# Allegro board io_4di_4do.brd
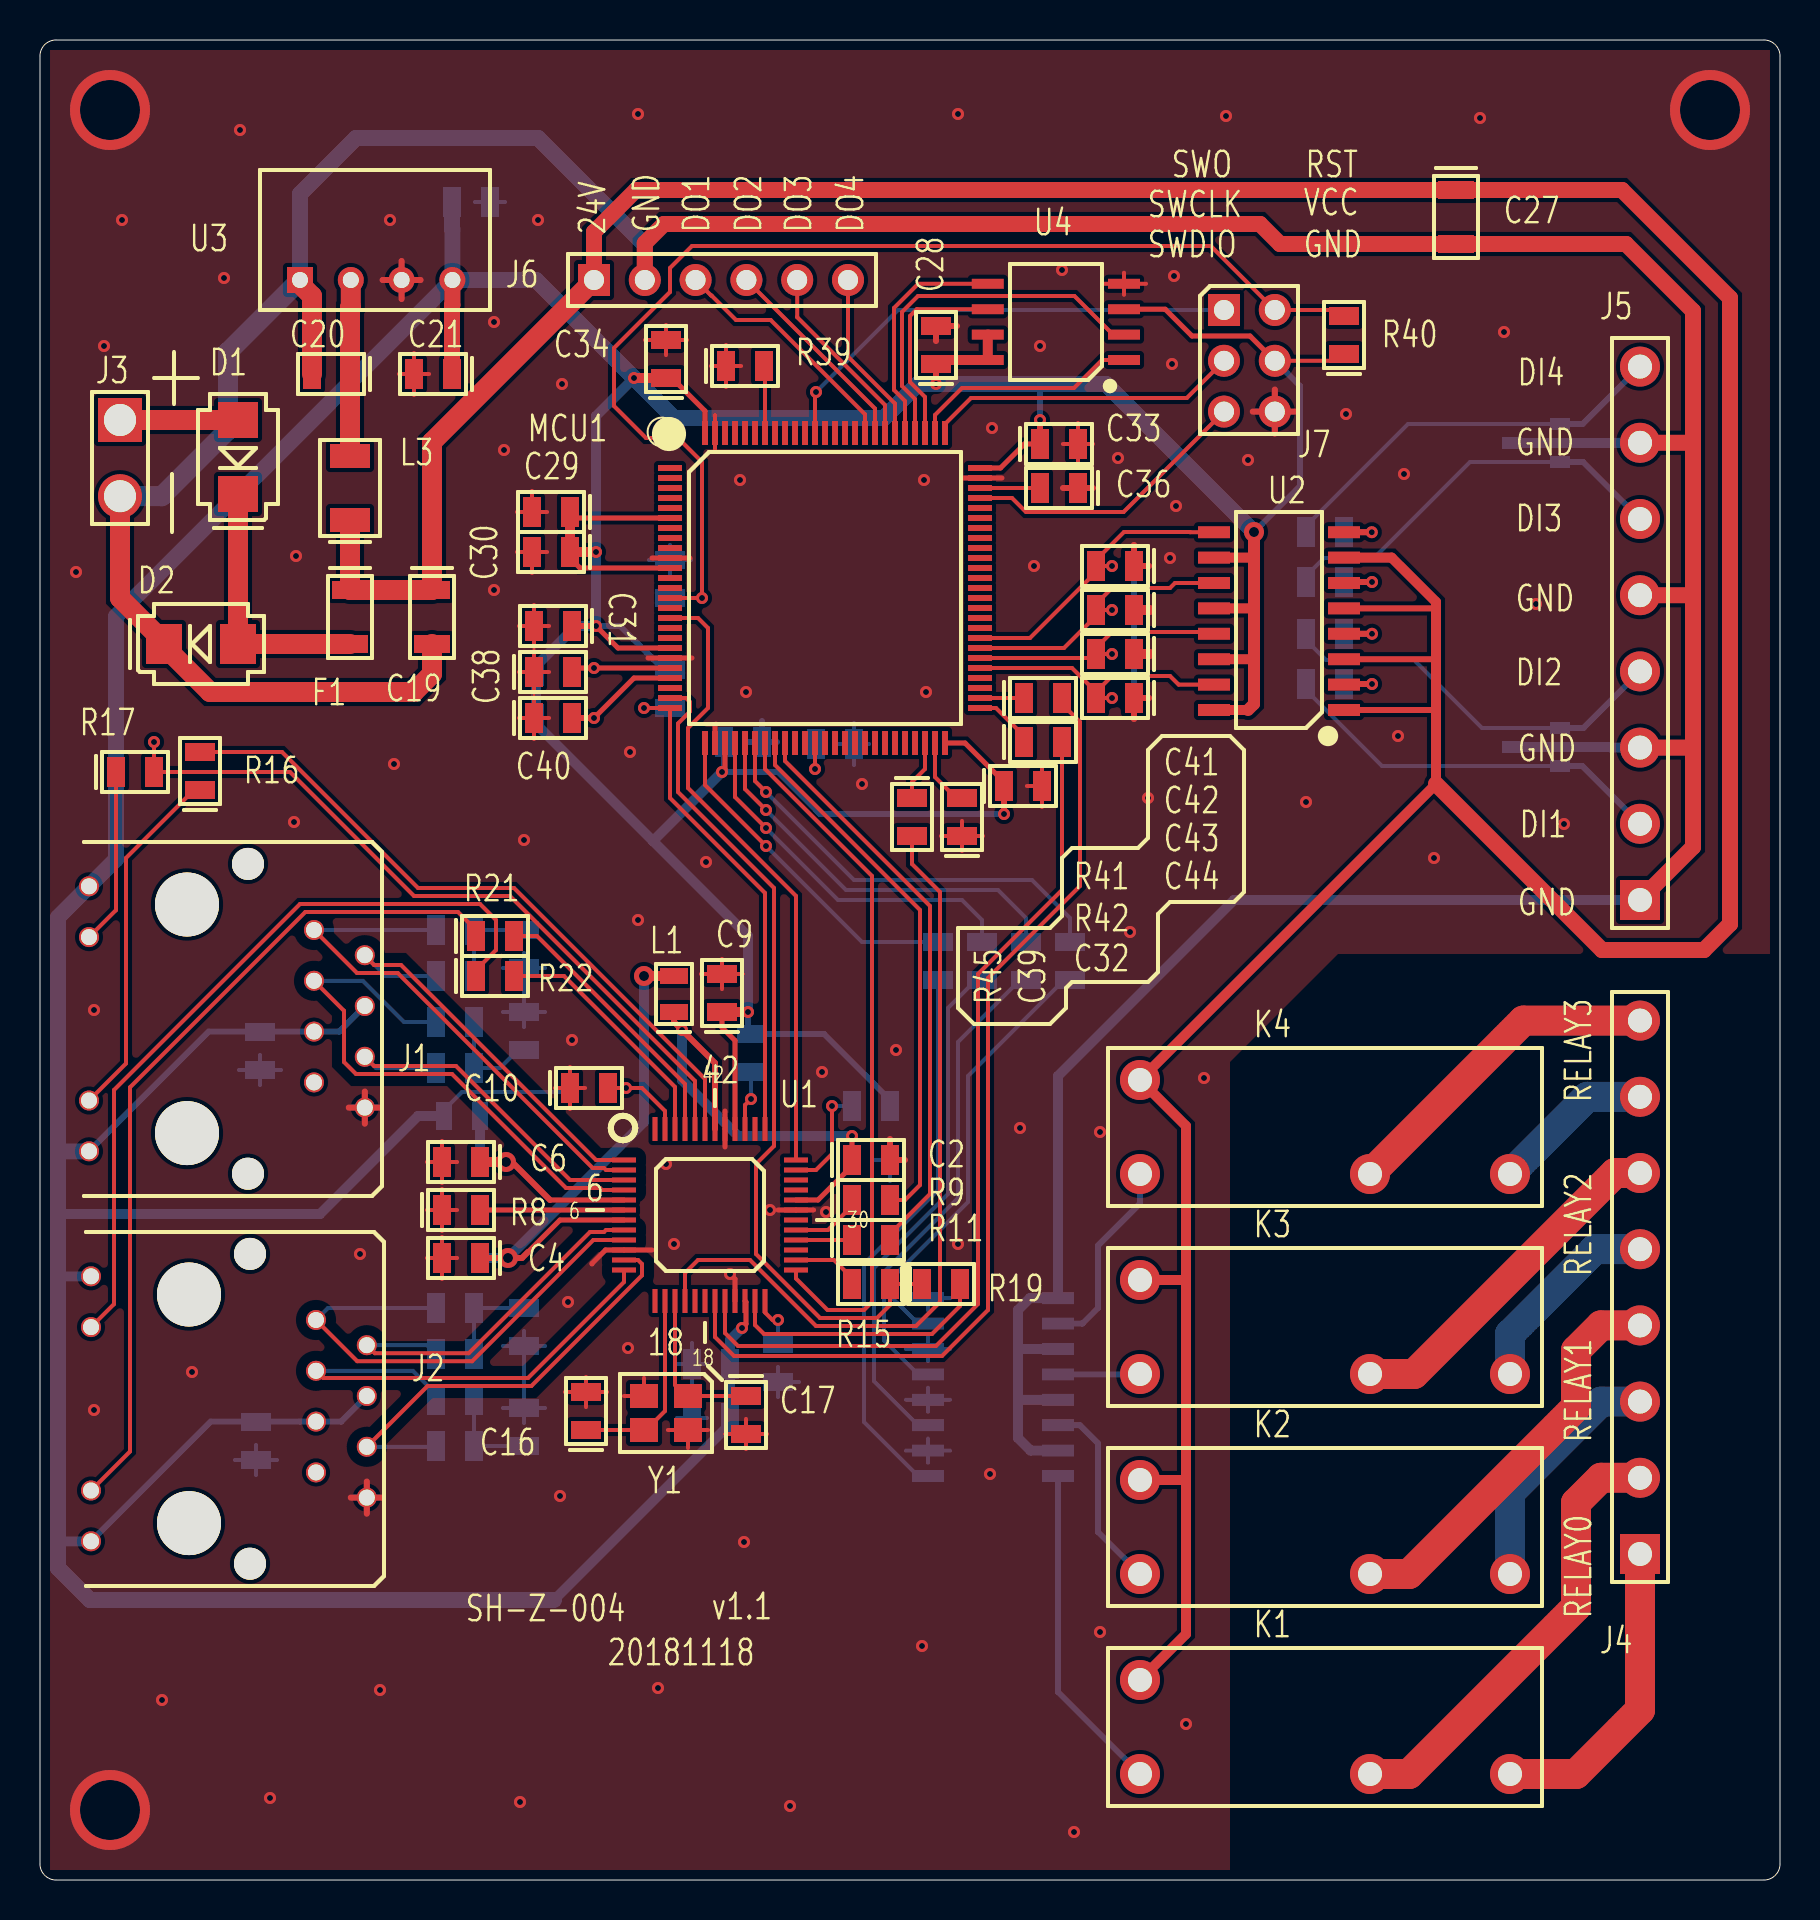
[diagram p0: board, top side]
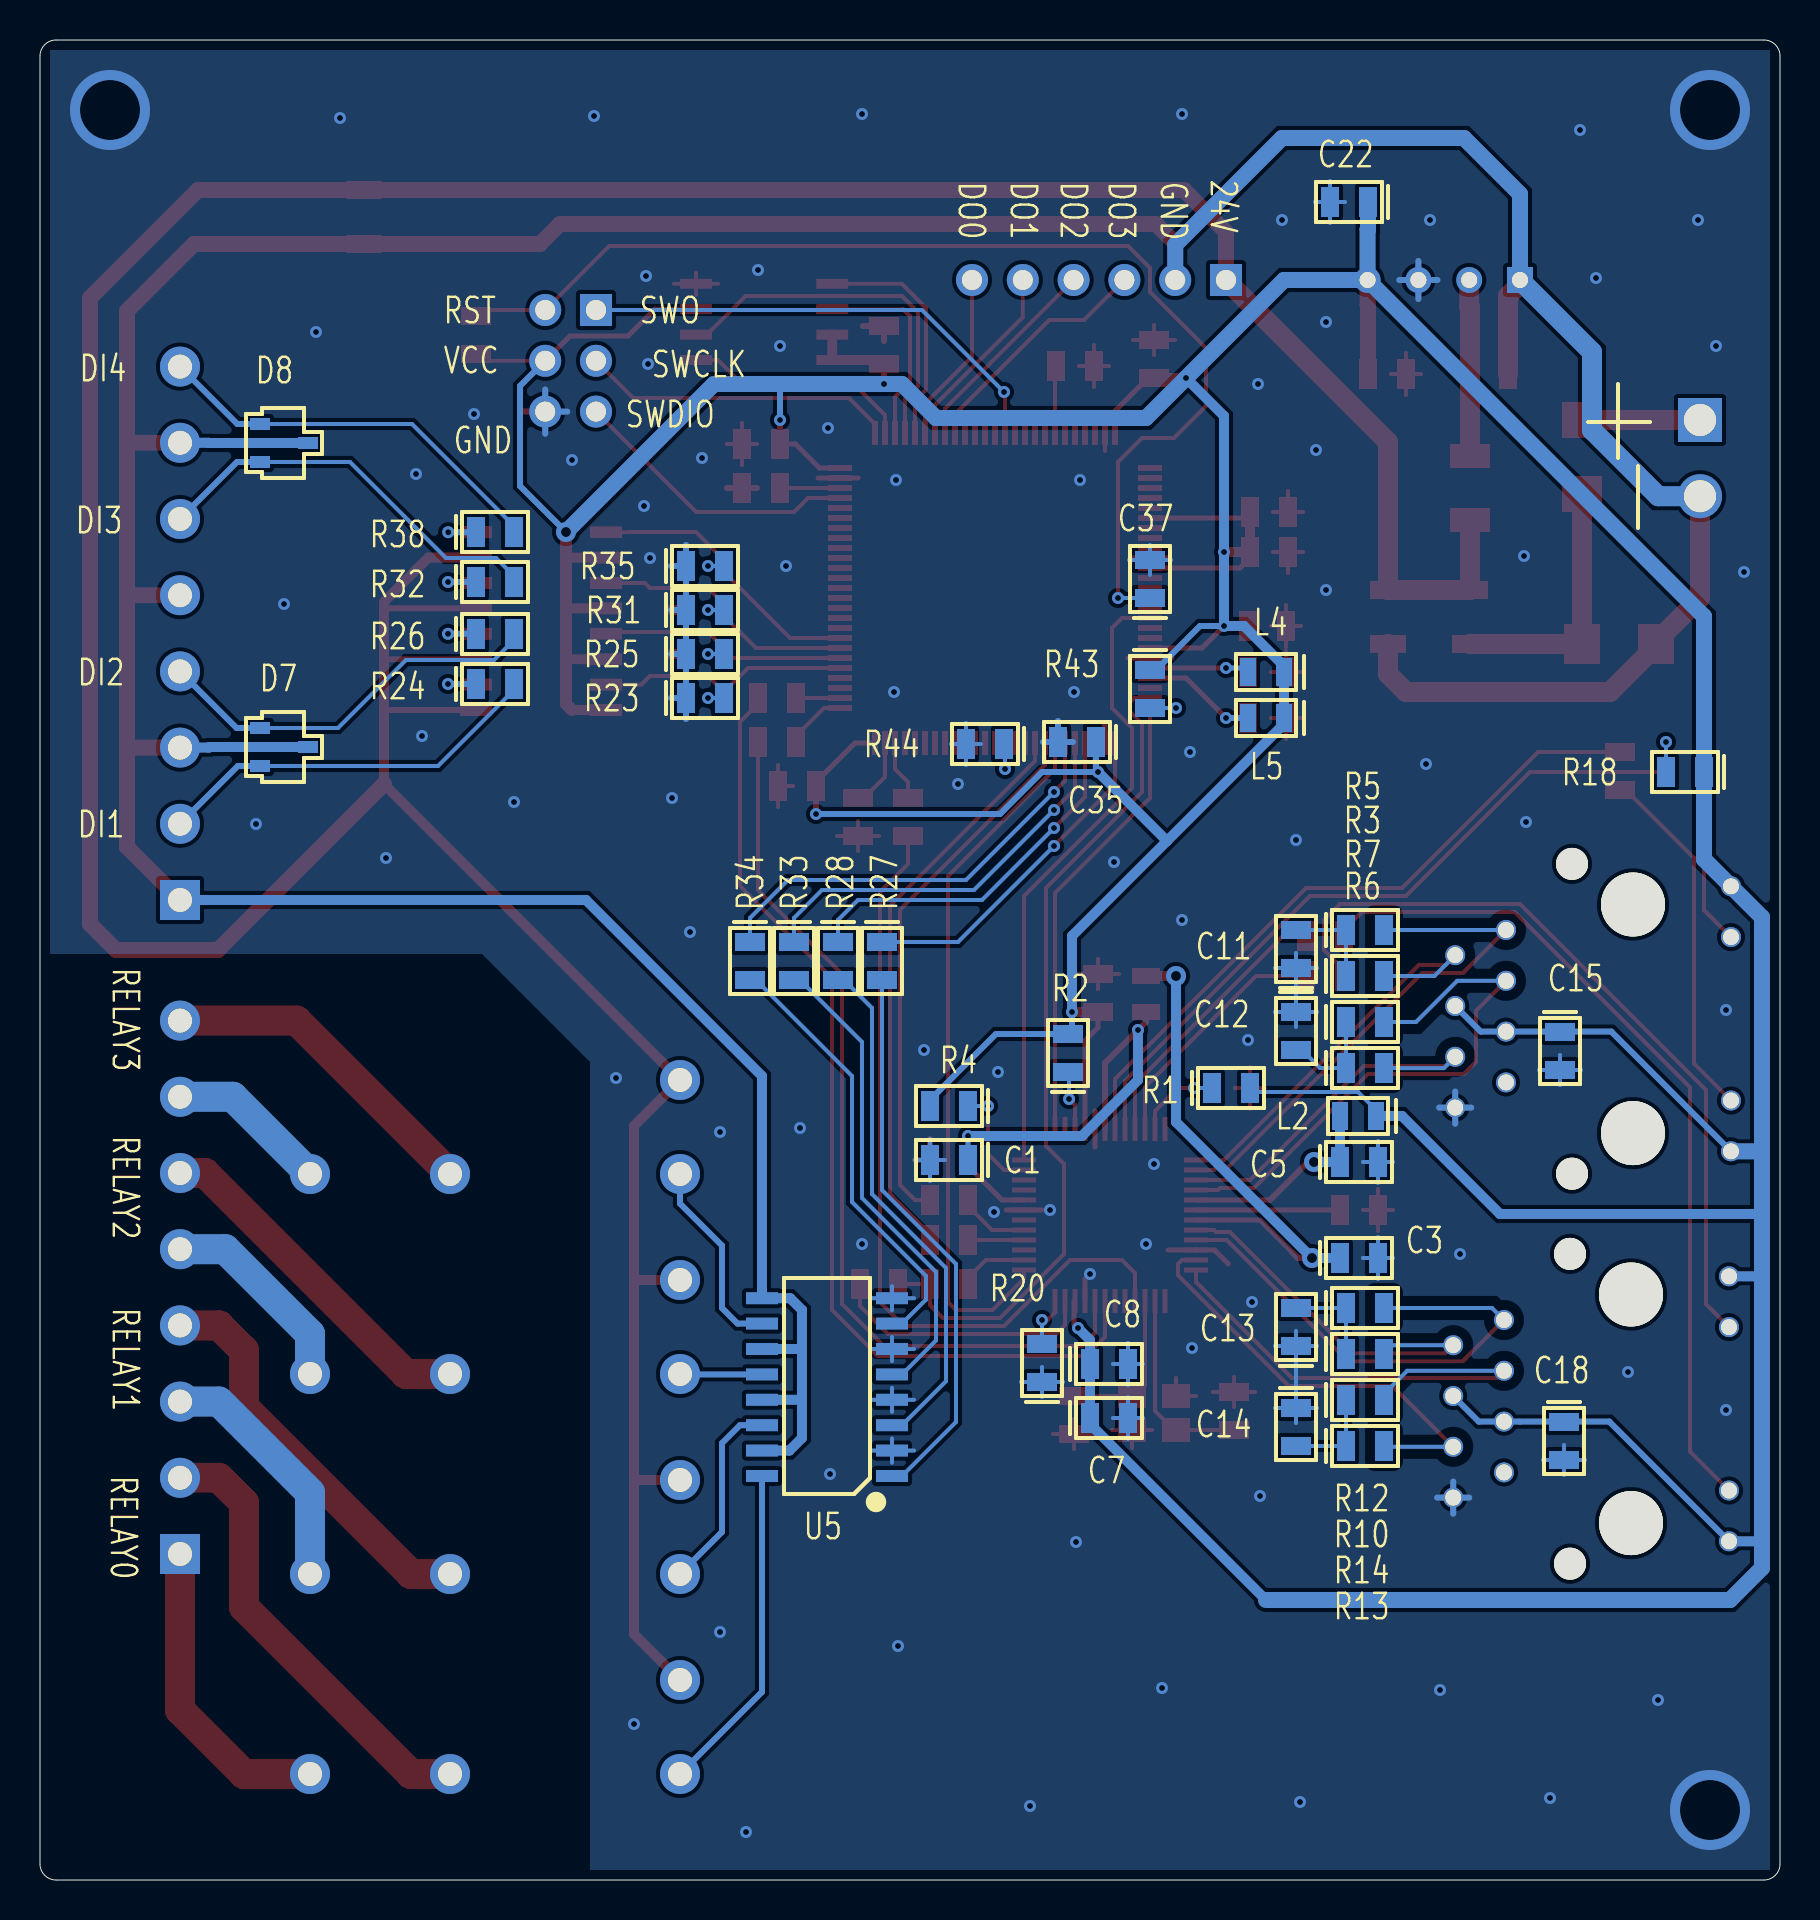
[diagram p1: board, bottom side, seen from below]

Outline 87 x 92 mm; copper layers: TOP, BOTTOM. Coordinates in mm from the lower left corner of the outline.
Outline path: 0,91.2 0,0.8 arc(0.23,0.23) 0.8,0 86.2,0 arc(86.77,0.23) 87,0.8 87,91.2 arc(86.77,91.77) 86.2,92 0.8,92 arc(0.23,91.77) 0,91.2

## Design rules (mm)
constraint set DEFAULT: pair gap 0.2
net group DP_RX1: nets RXM1 RXP1
net group DP_RX2: nets RXM2 RXP2
net group DP_TX1: nets TXM1 TXP1
net group DP_TX2: nets TXM2 TXP2

## Placement (name value [footprint] x y rotation side)
C1  47uF  [SMD_C_0805]  40.6 36 270 bottom
C2  100nF  [SMD_C_0805]  40.6 36 90 top
C3  47uF  [SMD_C_0805]  22 31.1 90 bottom
C4  100nF  [SMD_C_0805]  22 31.1 270 top
C5  47uF  [SMD_C_0805]  22 35.9 90 bottom
C6  100nF  [SMD_C_0805]  22 35.9 270 top
C7  47uF  [SMD_C_0805]  34.5 23.1 90 bottom
C8  100nF  [SMD_C_0805]  34.5 25.8 90 bottom
C9  100nF  [SMD_C_0805]  34.1 43.4 180 top
C10  100nF  [SMD_C_0805]  26.5 39.6 90 top
C11  100nF  [SMD_C_0805]  24.2 45.6 0 bottom
C12  100nF  [SMD_C_0805]  24.2 43.4 180 bottom
C13  100nF  [SMD_C_0805]  24.2 26.7 0 bottom
C14  100nF  [SMD_C_0805]  24.2 23.6 180 bottom
C15  100nF  [SMD_C_0805]  11 42.4 180 bottom
C16  18pF  [SMD_C_0805]  27.3 22.5 180 top
C17  18pF  [SMD_C_0805]  35.3 24.2 0 top
C18  100nF  [SMD_C_0805]  10.8 22.9 180 bottom
C19  10uF/50V  [SMD_C_1206]  19.6 64.5 0 top
C20  100nF/50V  [SMD_C_0805]  15.5 75.3 270 top
C21  47uF  [SMD_C_0805]  20.6 75.3 270 top
C22  47uF  [SMD_C_0805]  20.6 83.9 270 bottom
C27  10uF/50V  [SMD_C_1206]  70.8 84.5 0 top
C28  100nF  [SMD_C_0805]  44.8 75.8 180 top
C29  100nF  [SMD_C_0805]  26.5 68.4 270 top
C30  100nF  [SMD_C_0805]  26.5 66.4 270 top
C31  100nF  [SMD_C_0805]  26.6 62.7 270 top
C32  100nF  [SMD_C_0805]  48.2 54.7 90 top
C33  100nF  [SMD_C_0805]  50 71.8 90 top
C34  100nF  [SMD_C_0805]  31.3 75.1 180 top
C35  100nF  [SMD_C_0805]  34.2 56.9 270 bottom
C36  10uF  [SMD_C_0805]  51.9 69.6 270 top
C37  100nF  [SMD_C_0805]  31.5 64.1 0 bottom
C38  100nF  [SMD_C_0805]  24.7 60.4 90 top
C39  10uF  [SMD_C_0805]  46.1 52.2 180 top
C40  100nF  [SMD_C_0805]  24.7 58.1 90 top
C41  100nF  [SMD_C_0805]  54.7 65.7 270 top
C42  100nF  [SMD_C_0805]  54.7 63.5 270 top
C43  100nF  [SMD_C_0805]  54.7 61.3 270 top
C44  100nF  [SMD_C_0805]  54.7 59.1 270 top
D1  1N5822  [SMAF]  9.9 69.3 180 top
D2  SMAJ24CA  [DO-214AC]  6.2 61.8 90 top
D7  NUP2105LT1G  [SOT23_D]  75.9 57.6 270 bottom
D8  NUP2105LT1G  [SOT23_D]  75.9 72.8 270 bottom
F1  500mA  [SMD_R_1206]  15.5 64.5 0 top
J1  ETH1  [RJ45_HR911105A]  13.7 47.5 90 top
J2  ETH2  [RJ45_HR911105A]  13.8 28 90 top
J3  PWR  [C1X2_P381]  4 73 0 top
J4  DO  [C1X8_P381]  80 16.3 180 top
J5  DI  [C1X8_P381]  80 49 180 top
J6  Relay  [C1X6]  27.7 80 90 top
J7  SWD  [C2X3]  59.2 78.5 0 top
K1  -  [HF46F]  55 5.3 0 top
K2  -  [HF46F]  55 15.3 0 top
K3  -  [HF46F]  55 25.3 0 top
K4  -  [HF46F]  55 35.3 0 top
L1  bead  [SMD_L_0805]  31.7 43.4 180 top
L2  bead  [SMD_L_0805]  20.2 38.2 270 bottom
L3  6.8uH  [SMD_L_1210]  15.5 68 180 top
L4  bead  [SMD_L_0805]  24.8 60.4 270 bottom
L5  bead  [SMD_L_0805]  24.8 58.1 270 bottom
MCU1  STM32F407VET6  [LQFP100]  39.25 64.6 0 top
R1  10K  [SMD_R_0805]  28.4 39.6 90 bottom
R2  1K  [SMD_R_0805]  35.6 40.4 0 bottom
R3  51R  [SMD_R_0805]  21.7 45.2 90 bottom
R4  4.7K  [SMD_R_0805]  40.6 38.7 270 bottom
R5  51R  [SMD_R_0805]  21.7 47.5 90 bottom
R6  51R  [SMD_R_0805]  21.7 40.6 90 bottom
R7  51R  [SMD_R_0805]  21.7 42.9 90 bottom
R8  11.8K/1%  [SMD_R_0805]  20.1 33.5 90 top
R9  22R  [SMD_R_0805]  40.6 34 90 top
R10  51R  [SMD_R_0805]  21.7 26.3 90 bottom
R11  22R  [SMD_R_0805]  40.6 32 90 top
R12  51R  [SMD_R_0805]  21.7 28.6 90 bottom
R13  51R  [SMD_R_0805]  21.7 21.7 90 bottom
R14  51R  [SMD_R_0805]  21.7 24 90 bottom
R15  22R  [SMD_R_0805]  42.5 29.8 270 top
R16  220R  [SMD_R_0805]  8 54.5 180 top
R17  220R  [SMD_R_0805]  3.8 55.4 90 top
R18  4.7K  [SMD_R_0805]  3.8 55.4 270 bottom
R19  22R  [SMD_R_0805]  44.1 29.8 90 top
R20  1K  [SMD_R_0805]  36.9 24.9 0 bottom
R21  220R  [SMD_R_0805]  21.8 47.2 90 top
R22  220R  [SMD_R_0805]  21.8 45.2 90 top
R23  2K  [SMD_R_0805]  54.7 59.1 90 bottom
R24  2K  [SMD_R_0805]  65.2 59.8 90 bottom
R25  2K  [SMD_R_0805]  54.7 61.3 90 bottom
R26  2K  [SMD_R_0805]  65.2 62.3 90 bottom
R27  1K  [SMD_R_0805]  44.9 46.9 180 bottom
R28  1K  [SMD_R_0805]  47.1 46.9 180 bottom
R31  2K  [SMD_R_0805]  54.7 63.5 90 bottom
R32  2K  [SMD_R_0805]  65.2 64.9 90 bottom
R33  1K  [SMD_R_0805]  49.3 46.9 180 bottom
R34  1K  [SMD_R_0805]  51.5 46.9 180 bottom
R35  2K  [SMD_R_0805]  54.7 65.7 90 bottom
R38  2K  [SMD_R_0805]  65.2 67.4 90 bottom
R39  10K  [SMD_R_0805]  34.3 75.7 90 top
R40  10K  [SMD_R_0805]  65.2 76.3 180 top
R41  22R  [SMD_R_0805]  49.2 59.1 90 top
R42  22R  [SMD_R_0805]  49.2 56.9 90 top
R43  1.5K  [SMD_R_0805]  31.5 60.5 180 bottom
R44  10K  [SMD_R_0805]  38.8 56.8 270 bottom
R45  22R  [SMD_R_0805]  43.6 54.1 0 top
U1  KSZ8863RLL  [LQFP48]  33.5 33.25 0 top
U2  PS2801-4/SM  [SOP16]  65.2 58.5 180 top
U3  B2403  [B2403S]  13 80 0 top
U4  W25Q64  [SOIC8_208MIL]  53.8 76 180 top
U5  PS2801-4/SM  [SOP16]  44.4 20.2 0 bottom
Y1  25M  [SMD3225_CRYSTAL]  32.4 24.2 180 top

## Library data of the parts
C1-C22 C27-C44 = CAP NP
D1 = DIODE
D2 = DIODE BI-DIR TRIG
D7 D8 = SM712
F1 = FUSE
J1 J2 = RJ45_HR911105A
J3 = C1X2
J4 J5 = C1X8Gen
J6 = C1X6Gen
J7 = C2X3
K1-K4 = HF46F
L1-L5 = INDUCTOR
MCU1 = STM32F407VET
R1-R28 R31-R35 R38-R45 = RESISTOR
U1 = KSZ8863RLL
U2 U5 = PS2801-4/SM
U3 = B2403S
U4 = GD25Q64C
Y1 = crystal-4pin_1

## Footprints (pads in the part's own frame, mm; a bottom-side part is the same pattern mirrored in y, then rotated)
B2403S
  rect 1.3x1.3 hole 0.8: 1(0,0)
  round 1.3 hole 0.8: 2(2.54,0) 3(5.08,0) 4(7.62,0)
C1X2_P381
  rect 2.2x2.2 hole 1.6: 1(0,0)
  round 2.2 hole 1.6: 2(0,-3.81)
C1X6
  rect 1.6x1.6 hole 1: 1(0,0)
  round 1.6 hole 1: 2(0,-2.54) 3(0,-5.08) 4(0,-7.62) 5(0,-10.16) 6(0,-12.7)
C1X8_P381
  rect 2x2 hole 1.2: 1(0,0)
  round 2 hole 1.2: 2(0,-3.81) 3(0,-7.62) 4(0,-11.43) 5(0,-15.24) 6(0,-19.05) 7(0,-22.86) 8(0,-26.67)
C2X3
  rect 1.6x1.6 hole 1: 1(0,0)
  round 1.6 hole 1: 2(0,-2.54) 3(0,-5.08) 4(2.54,-5.08) 5(2.54,-2.54) 6(2.54,0)
DO-214AC
  rect 2x1.8 smd: 1(0,0) 2(0,-3.7)
HF46F
  round 2 hole 1.2: 1(0,4.7) 2(0,0) 3(11.5,0) 4(18.5,0)
LQFP48
  rect 1.2x0.25 smd: 1(-4.3,2.75) 2(-4.3,2.25) 3(-4.3,1.75) 4(-4.3,1.25) 5(-4.3,0.75) 6(-4.3,0.25) 7(-4.3,-0.25) 8(-4.3,-0.75) 9(-4.3,-1.25) 10(-4.3,-1.75) 11(-4.3,-2.25) 12(-4.3,-2.75) 25(4.3,-2.75) 26(4.3,-2.25) 27(4.3,-1.75) 28(4.3,-1.25) 29(4.3,-0.75) 30(4.3,-0.25) 31(4.3,0.25) 32(4.3,0.75) 33(4.3,1.25) 34(4.3,1.75) 35(4.3,2.25) 36(4.3,2.75)
  rect 0.25x1.2 smd: 13(-2.75,-4.3) 14(-2.25,-4.3) 15(-1.75,-4.3) 16(-1.25,-4.3) 17(-0.75,-4.3) 18(-0.25,-4.3) 19(0.25,-4.3) 20(0.75,-4.3) 21(1.25,-4.3) 22(1.75,-4.3) 23(2.25,-4.3) 24(2.75,-4.3) 37(2.75,4.3) 38(2.25,4.3) 39(1.75,4.3) 40(1.25,4.3) 41(0.75,4.3) 42(0.25,4.3) 43(-0.25,4.3) 44(-0.75,4.3) 45(-1.25,4.3) 46(-1.75,4.3) 47(-2.25,4.3) 48(-2.75,4.3)
LQFP100
  rect 1.2x0.3 smd: 1(-7.75,6) 2(-7.75,5.5) 3(-7.75,5) 4(-7.75,4.5) 5(-7.75,4) 6(-7.75,3.5) 7(-7.75,3) 8(-7.75,2.5) 9(-7.75,2) 10(-7.75,1.5) 11(-7.75,1) 12(-7.75,0.5) 13(-7.75,0) 14(-7.75,-0.5) 15(-7.75,-1) 16(-7.75,-1.5) 17(-7.75,-2) 18(-7.75,-2.5) 19(-7.75,-3) 20(-7.75,-3.5) 21(-7.75,-4) 22(-7.75,-4.5) 23(-7.75,-5) 24(-7.75,-5.5) 25(-7.75,-6) 51(7.75,-6) 52(7.75,-5.5) 53(7.75,-5) 54(7.75,-4.5) 55(7.75,-4) 56(7.75,-3.5) 57(7.75,-3) 58(7.75,-2.5) 59(7.75,-2) 60(7.75,-1.5) 61(7.75,-1) 62(7.75,-0.5) 63(7.75,0) 64(7.75,0.5) 65(7.75,1) 66(7.75,1.5) 67(7.75,2) 68(7.75,2.5) 69(7.75,3) 70(7.75,3.5) 71(7.75,4) 72(7.75,4.5) 73(7.75,5) 74(7.75,5.5) 75(7.75,6)
  rect 0.3x1.2 smd: 26(-6,-7.75) 27(-5.5,-7.75) 28(-5,-7.75) 29(-4.5,-7.75) 30(-4,-7.75) 31(-3.5,-7.75) 32(-3,-7.75) 33(-2.5,-7.75) 34(-2,-7.75) 35(-1.5,-7.75) 36(-1,-7.75) 37(-0.5,-7.75) 38(0,-7.75) 39(0.5,-7.75) 40(1,-7.75) 41(1.5,-7.75) 42(2,-7.75) 43(2.5,-7.75) 44(3,-7.75) 45(3.5,-7.75) 46(4,-7.75) 47(4.5,-7.75) 48(5,-7.75) 49(5.5,-7.75) 50(6,-7.75) 76(6,7.75) 77(5.5,7.75) 78(5,7.75) 79(4.5,7.75) 80(4,7.75) 81(3.5,7.75) 82(3,7.75) 83(2.5,7.75) 84(2,7.75) 85(1.5,7.75) 86(1,7.75) 87(0.5,7.75) 88(0,7.75) 89(-0.5,7.75) 90(-1,7.75) 91(-1.5,7.75) 92(-2,7.75) 93(-2.5,7.75) 94(-3,7.75) 95(-3.5,7.75) 96(-4,7.75) 97(-4.5,7.75) 98(-5,7.75) 99(-5.5,7.75) 100(-6,7.75)
RJ45_HR911105A
  round 1.6 hole 1.6 unplated: (-12.185,3.3) (3.305,3.3)
  round 3.2 hole 3.2 unplated: (-10.155,6.35) (1.275,6.35)
  round 1 hole 0.8: 1(0,0) 2(-1.26,-2.54) 3(-2.54,0) 4(-3.8,-2.54) 5(-5.08,0) 6(-6.34,-2.54) 7(-7.62,0) 8(-8.88,-2.54) 9(2.185,11.25) 10(-0.355,11.25) 11(-8.525,11.25) 12(-11.065,11.25)
SMAF
  rect 2x1.8 smd: 1(0,0) 2(0,-3.7)
SMD3225_CRYSTAL
  rect 1.4x1.2 smd: 1(0,0) 2(2.2,0) 3(2.2,1.7) 4(0,1.7)
SMD_C_0805
  rect 1.5x0.9 smd: 1(0,0) 2(0,-1.9)
SMD_C_1206
  rect 1.8x0.9 smd: 1(0,0) 2(0,-2.7)
SMD_L_0805
  rect 1.4x0.8 smd: 1(0,0) 2(0,-1.8)
SMD_L_1210
  rect 2x1.2 smd: 1(0,0) 2(0,-3.2)
SMD_R_0805
  rect 1.5x0.9 smd: 1(0,0) 2(0,-1.9)
SMD_R_1206
  rect 1.8x0.9 smd: 1(0,0) 2(0,-2.7)
SOIC8_208MIL
  rect 1.6x0.5 smd: 1(-0.4,0) 2(-0.4,-1.27) 3(-0.4,-2.54) 4(-0.4,-3.81) 5(6.41,-3.81) 6(6.41,-2.54) 7(6.41,-1.27) 8(6.41,0)
SOP16
  rect 1.6x0.6 smd: 1(0,0) 2(0,-1.27) 3(0,-2.54) 4(0,-3.81) 5(0,-5.08) 6(0,-6.35) 7(0,-7.62) 8(0,-8.89) 9(6.5,-8.89) 10(6.5,-7.62) 11(6.5,-6.35) 12(6.5,-5.08) 13(6.5,-3.81) 14(6.5,-2.54) 15(6.5,-1.27) 16(6.5,0)
SOT23_D
  rect 0.6x1 smd: 1(0,-0.1) 2(1.9,-0.1) 3(0.95,2.3)

## Nets
1.8V: C1.1 C2.1 L1.1 U1.32 U1.42
3.3V: C7.1 C8.1 C9.1 C15.1 C18.1 C21.1 C22.1 C28.1 C29.1 C30.1 C31.1 C32.1 C33.1 C34.1 C35.1 J1.4 J1.5 J1.9 J1.12 J2.4 J2.5 J2.9 J2.12 J7.5 L2.1 L4.1 L5.1 MCU1.6 MCU1.11 MCU1.19 MCU1.28 MCU1.50 MCU1.75 MCU1.100 R1.2 R2.2 R4.2 R18.1 R40.1 R43.1 U1.22 U1.40 U2.10 U2.12 U2.14 U2.16 U3.4 U4.3(WP#) U4.7 U4.8
24V: C19.1 C27.1 F1.1 J6.1 K1.1 K2.1 K3.1 K4.1 L3.1 U2.1 U2.3 U2.5 U2.7
GND: C1.2 C2.2 C3.2 C4.2 C5.2 C6.2 C7.2 C8.2 C9.2 C10.1 C11.1 C12.1 C13.1 C14.1 C15.2 C16.2 C17.2 C18.2 C21.2 C22.2 C28.2 C29.2 C30.2 C31.2 C32.2 C33.2 C34.2 C35.2 C36.1 C37.2 C38.1 C39.1 C40.1 C41.1 C42.1 C43.1 C44.1 J1.8 J2.8 J7.4 MCU1.10 MCU1.20(VSSA) MCU1.27 MCU1.74 MCU1.99 R8.1 R20.1 R23.1 R25.1 R31.1 R35.1 R39.1 R44.2 U1.10 U1.21 U1.31 U1.41 U3.3 U4.4 U5.2 U5.4 U5.6 U5.8 Y1.2 Y1.4(GND#4)
GND_EXT: C19.2 C20.2 C27.2 D2.1 D7.3 D8.3 J3.2 J5.1 J5.3 J5.5 J5.7 J6.2 U3.1 U5.9(EMITTER) U5.11 U5.13 U5.15
VDDA: C40.2 L5.2 MCU1.22
VDDA_1.8: C3.1 C4.1 L1.2 U1.7
VDDA_3.3: C5.1 C6.1 L2.2 U1.5
DI_IN_0: D7.2(IO#2) J5.2 R24.2
DI_IN_1: D7.1 J5.4 R26.2
DI_IN_2: D8.2(IO#2) J5.6 R32.2
DI_IN_3: D8.1 J5.8 R38.2
DI_TTL_0: C44.2 MCU1.55 R23.2 U2.15
DI_TTL_1: C43.2 MCU1.56 R25.2 U2.13
DI_TTL_2: C42.2 MCU1.57 R31.2 U2.11
DI_TTL_3: C41.2 MCU1.58 R35.2 U2.9(EMITTER)
DO_TTL_0: MCU1.26 R27.1
DO_TTL_1: MCU1.29 R28.1
DO_TTL_2: MCU1.30 R33.1
DO_TTL_3: MCU1.31 R34.1
ETH1_LED0: R17.2 R18.2 U1.44
ETH1_LED1: R16.2 U1.43
ETH2_LED0: R22.2 U1.46
ETH2_LED1: R21.2 U1.45
ETH_CRS_DV: MCU1.32 U1.25
ETH_MDC: MCU1.16 U1.36
ETH_MDIO: MCU1.25 R43.2 U1.37
ETH_REF_CLK: MCU1.24 R15.1 R19.1
ETH_RXD0: MCU1.33 R9.2
ETH_RXD1: MCU1.34 R11.2
ETH_TX_EN: R45.2 U1.16
ETH_TXD0: R42.2 U1.20
ETH_TXD1: R41.2 U1.19
FLASH_CS: MCU1.77 U4.1
FLASH_MISO: MCU1.79 U4.2
FLASH_MOSI: MCU1.80 U4.5
FLASH_SCK: MCU1.78 U4.6
RELAY_0: J6.6 MCU1.81
RELAY_0_IN: J4.1 K1.4
RELAY_0_OUT: J4.2 K1.3(OUT)
RELAY_1: J6.5 MCU1.82
RELAY_1_IN: J4.3 K2.4
RELAY_1_OUT: J4.4 K2.3(OUT)
RELAY_2: J6.4 MCU1.83
RELAY_2_IN: J4.5 K3.4
RELAY_2_OUT: J4.6 K3.3(OUT)
RELAY_3: J6.3 MCU1.84
RELAY_3_IN: J4.7 K4.4
RELAY_3_OUT: J4.8 K4.3(OUT)
RST: C37.1 J7.6 MCU1.14 R40.2
RXM1: J1.2 R3.2 U1.1
RXM2: J2.2 R10.2 U1.8
RXP1: J1.1(TXP) R5.2 U1.2
RXP2: J2.1(TXP) R12.2 U1.9
SWCLK: J7.2 MCU1.76
SWDIO: J7.3 MCU1.72
SWO: J7.1 MCU1.89
TXM1: J1.6 R6.2 U1.3
TXM2: J2.6 R13.2 U1.11
TXP1: J1.3 R7.2 U1.4
TXP2: J2.3 R14.2 U1.12
VREF: C38.2 L4.2 MCU1.21
N3788396: MCU1.94 R39.2
N3788604: C36.2 MCU1.73
N3788651: C39.2 MCU1.49
N3796397: MCU1.37 R44.1
N3796963: MCU1.48 R45.1
N4537878: R24.1 U2.2
N4538644: R26.1 U2.4
N4538843: R38.1 U2.8
N4539052: R32.1 U2.6
N4547709: MCU1.51 R42.1
N4547713: MCU1.52 R41.1
N4548481: R8.2 U1.6
N4551709: C16.1 U1.14 Y1.3
N4551769: C17.1 U1.15(X2) Y1.1
N4553149: R20.2 U1.24
N4554278: R4.1 U1.35
N4554434: R2.1 U1.39
N4554520: C11.2 R3.1 R5.1
N4554841: C12.2 R6.1 R7.1
N4555040: C13.2 R10.1 R12.1
N4555226: C14.2 R13.1 R14.1
N4558201: C10.2 R1.1 U1.47
N4585606: R15.2 U1.26
N4585853: R9.1 U1.29
N4585857: R11.1 U1.28
N4589372: J1.10 R17.1
N4589863: J1.11 R16.1
N4590672: J2.11 R21.1
N4590712: J2.10 R22.1
N4616330: R19.2 U1.23
N4623177: D1.2 J3.1
N4623416: D1.1(K) D2.2 F1.2
N4630323: C20.1 L3.2 U3.2(VIN)
N4647911: K1.2 U5.16
N4648415: K2.2 U5.14
N4648882: K4.2 U5.10
N4649360: K3.2 U5.12
N4658948: R27.2 U5.1
N4659355: R28.2 U5.3
N4659946: R33.2 U5.5
N4659970: R34.2 U5.7

Pads without a net: J1 7; J2 7; MCU1 1 2 3 4 5 7 8 9 12 13 15 17 18 23 35 36 38 39 40 41 42 43 44 45 46 47 53 54 59 60 61 62 63 64 65 66 67 68 69 70 71 85 86 87 88 90 91 92 93 95 96 97 98; U1 13 17 18 27 30 33 34 38 48

## Via types
v1: diameter 0.6, hole 0.3, TOP to BOTTOM, 112 vias
v2: diameter 1, hole 0.5, TOP to BOTTOM, 4 vias
v3: diameter 4, hole 3, TOP to BOTTOM, 3 vias

## Routing (per net, layer and track width the routed paths; a pad name or vN(x,y) marks a point on that pad's centre or on a via; arc(x,y) is an arc through that point)
1.8V: length 25.1
  TOP w0.25: v1(40.6,37.2) C2.1 40.6,35.7 38.9,34 U1.32
  TOP w0.3: U1.42 33.75,40.85 v1(32.1,42.5) 31.7,42.9 L1.1
  BOTTOM w0.25: v1(40.6,37.2) C2.1
  BOTTOM w0.5: v1(40.6,37.2) 34.9,37.2 32.1,40 v1(32.1,42.5)
3.3V: length 405.7
  TOP w0.2: R40.1 64.86,75.96 J7.5
  TOP w0.25: v1(27.8,62.7) 28.9,61.6 MCU1.19 ; MCU1.11 27,65.6 26.5,66.1 C30.1 ; MCU1.100 33.25,73.45 31.6,75.1 C34.1 ; v1(35.1,27.6) 35.3,27.8 35.3,28.9 U1.22 ; C33.1 49.22,71.8 48.02,70.6 MCU1.75 ; 26.5,68.3 26.7,68.1 MCU1.6 ; U4.3 56.26,78.54 57.6,77.2 60.5,77.2 J7.5 ; C9.1 34.1,42.62 34.75,41.97 U1.40 ; MCU1.50 46.25,56.85 48.2,54.9 C32.1 ; MCU1.28 34.25,55.55 v1(34.1,55.4)
  TOP w0.3: v1(27.8,62.7) C31.1 ; v1(44.8,74.8) C28.1 44.8,76 ; v1(50,73) C33.1 ; v1(48.2,53.3) C32.1
  TOP w0.5: U2.12 60.68,63.58 60.7,63.6 ; C34.1 v1(29.7,75.1) ; U2.10 60.68,66.12 60.7,66.1 ; v1(27.8,66.4) C30.1 C29.1 ; 60.7,61 60.66,61.04 U2.14 ; C9.1 v1(35.4,43.4) ; 44.8,76 U4.8 U4.7 ; 60.4,58.5 U2.16
  TOP w0.6: v2(60.7,67.4) 60.7,58.8 60.4,58.5
  TOP w0.8: C21.1 20.6,78.73 20.62,78.75 U3.4
  BOTTOM w0.2: R1.2 26.3,39.4 21.1,39.4 20.2,38.5 L2.1 ; 11.4,42.42 11.38,42.4 C15.1 ; 13,22.92 12.98,22.9 C18.1
  BOTTOM w0.3: J2.12 8.54,22.92 J2.5 15.06,22.92 J2.4 ; J1.4 14.96,42.42 J1.5 8.44,42.42 J1.12 ; R4.2 42.5,39 39.2,42.3 R2.2 35.4,42.5 v1(35.4,43.4) ; 50,74.8 v1(50,73) ; C35.1 34.2,55.5 v1(34.1,55.4) 36.9,55.4 39,53.3 v1(48.2,53.3) ; v1(27.8,62.7) 29,62.7 31.2,60.5 R43.1 ; v2(60.7,67.4) 63,69.7 63,74.7 J7.5
  BOTTOM w0.5: 0.9,30.2 0.92,30.18 J2.9 ; v1(29.7,75.1) 27.8,73.2 v1(27.8,66.4) v1(27.8,62.7) 26.8,62.7 24.8,60.7 L4.1 L5.1 24.8,57.8 30.65,51.95 ; 30.65,51.95 35.4,47.2 v1(35.4,43.4) ; 30.65,51.95 v1(34.1,55.4) ; 25.7,14 34.5,22.8 C7.1 C8.1 34.5,27 v1(35.1,27.6) ; 0.9,33.3 14,33.3 18.9,38.2 L2.1 ; 0.9,16.9 0.94,16.93 J2.12
  BOTTOM w0.8: 0.9,36.4 0.9,15.6 2.5,14 25.7,14 ; 0.9,36.4 0.9,48.13 J1.9 3.8,51.03 R18.1 3.8,63.18 U3.4 ; 0.9,36.4 0.94,36.44 J1.12 ; U3.4 20.62,82.53 20.6,82.55 C22.1 ; U3.4 24.8,80 v1(29.7,75.1) 31.7,73.1 42.2,73.1 43.9,74.8 v1(44.8,74.8) 53.3,74.8 v2(60.7,67.4)
24V: length 224.6
  TOP w0.3: 69.8,63.6 69.78,63.58 U2.5 ; U2.1 69.8,58.5 ; U2.3 69.76,61.04 69.8,61
  TOP w0.5: 57.3,30 57.3,37.7 K4.1 69.8,54.8 69.8,63.9 67.58,66.12 U2.7 ; 57.3,30 57.3,20 ; 57.3,30 K3.1 ; K2.1 57.3,20 ; 57.3,20 57.3,12.3 K1.1
  TOP w0.8: 69.8,54.8 78.1,46.5 83.2,46.5 84.5,47.8 84.5,79.1 79.1,84.5 C27.1 29.8,84.5 27.7,82.4 J6.1
  TOP w1: L3.1 F1.1 C19.1 19.6,71.9 J6.1
GND: length 210.2
  TOP w0.2: R39.1 35.05,75.7 ; R39.1 34.3,74.65 ; R39.1 33.55,75.7 ; R39.1 34.3,76.75 ; 20.1,30.05 C4.2 ; C4.2 19.35,31.1 ; C4.2 20.1,32.15 ; C4.2 20.85,31.1 ; 31.3,76.25 C34.2 ; C34.2 32.35,77 ; C34.2 31.3,77.75 ; C34.2 30.25,77 ; C40.1 25.45,58.1 ; C40.1 24.7,57.05 ; C40.1 24.7,59.15 ; C40.1 23.95,58.1 ; C38.1 24.7,61.45 ; C38.1 23.95,60.4 ; C38.1 25.45,60.4 ; C38.1 24.7,59.35 ; 27.3,23.65 C16.2 ; C16.2 27.3,25.15 ; C16.2 26.25,24.4 ; C16.2 28.35,24.4 ; 26.5,38.55 C10.1 ; C10.1 26.5,40.65 ; C10.1 27.25,39.6 ; C10.1 25.75,39.6 ; 24.7,61.65 C31.2 ; C31.2 23.95,62.7 ; C31.2 24.7,63.75 ; C31.2 25.45,62.7 ; 23.85,68.4 C29.2 ; C29.2 25.35,68.4 ; C29.2 24.6,69.45 ; C17.2 36.35,22.3 ; C17.2 35.3,23.05 ; C17.2 34.25,22.3 ; C17.2 35.3,21.55 ; 33.75,71.45 MCU1.99 33.75,73.25 ; U4.4 54.2,80.36 ; U4.4 55.3,79.81 ; U4.4 53.1,79.81 ; U4.4 54.2,79.26 ; 19.35,33.5 R8.1 ; R8.1 20.1,34.55 ; R8.1 20.85,33.5 ; R8.1 20.1,32.45 ; C33.2 51.9,72.85 ; C33.2 51.9,70.75 ; C33.2 51.15,71.8 ; C33.2 52.65,71.8 ; C21.2 18.7,76.35 ; C21.2 18.7,74.25 ; C21.2 17.95,75.3 ; C21.2 19.45,75.3 ; C30.2 25.35,66.4 ; C30.2 24.6,65.35 ; C30.2 23.85,66.4 ; Y1.4 33.4,22.5 ; Y1.4 31.4,22.5 ; Y1.4 32.4,21.6 ; C32.2 50.1,55.75 ; C32.2 50.1,53.65 ; C32.2 49.35,54.7 ; C39.1 47.15,52.2 ; C39.1 46.1,51.45 ; C39.1 46.1,52.95 ; C39.1 45.05,52.2 ; 20.1,34.85 C6.2 ; C6.2 20.1,36.95 ; C6.2 20.85,35.9 ; C6.2 19.35,35.9 ; 30.2,25.1 Y1.2 29.2,24.2 ; C9.2 35.15,45.3 ; C9.2 34.1,46.05 ; C9.2 34.1,44.55 ; C9.2 33.05,45.3 ; 38.7,33.5 38.67,33.5
  TOP w0.25: 32.6,61.1 MCU1.20 30.4,61.1 ; 38.67,33.5 U1.31 36.9,33.5 ; 34.25,36.65 U1.41 34.25,38.45 ; 30.6,66.1 MCU1.10 32.5,66.1 ; 33.8,57.8 33.75,57.75 MCU1.27 ; 27.6,30.8 27.6,30.83 28.27,31.5 U1.10 30.6,31.5 ; 46.1,70.1 MCU1.74 48.1,70.1 ; U1.21 34.75,30.05 v1(34.5,30.3)
  TOP w0.3: J2.8 16.34,18.32 ; J2.8 17.14,19.12 ; J2.8 15.54,19.12 ; J2.8 16.34,19.92 ; J7.4 60.64,73.42 ; J7.4 62.84,73.42 ; J7.4 61.74,74.52 ; J7.4 61.74,72.32 ; 43.25,36 C2.2 42.5,37.05 ; 52.65,69.6 C36.1 51.15,69.6 ; U3.3 18.08,79.05 ; U3.3 18.08,80.95 ; U3.3 19.03,80 ; U3.3 17.13,80 ; J1.8 15.44,38.62 ; J1.8 17.04,38.62 ; J1.8 16.24,37.82 ; J1.8 16.24,39.42 ; 45.85,77.7 C28.2 44.8,76.95 ; 55.45,65.7 C41.1 54.7,66.75 ; 55.45,59.1 C44.1 54.7,58.05
  TOP w0.5: C43.1 55.5,61.3 ; C42.1 55.5,63.5
  BOTTOM w0.2: 24.2,22.85 C14.1 ; C14.1 25.25,23.6 ; C14.1 23.15,23.6 ; C14.1 C13.1 ; C6.2 20.85,35.9 ; C6.2 20.1,34.85 ; C6.2 20.1,36.95 ; C6.2 19.35,35.9 ; C12.1 C11.1 ; C12.1 23.15,43.4 ; C12.1 25.25,43.4 ; C12.1 24.2,42.65 ; C11.1 24.2,46.35 ; C11.1 23.15,45.6 ; C11.1 25.25,45.6 ; U5.8 44.4,29.69 ; U5.8 45.5,29.09 ; U5.8 44.4,28.49 ; U5.8 43.3,29.09 ; C15.2 11,41.25 ; C15.2 12.05,40.5 ; C15.2 9.95,40.5 ; C15.2 11,39.75 ; U5.4 45.5,24.01 ; U5.4 43.3,24.01 ; U5.4 44.4,24.61 ; U5.4 44.4,23.41 ; 10.8,20.25 C18.2 ; C18.2 10.8,21.75 ; C18.2 11.85,21 ; C18.2 9.75,21 ; C37.2 32.55,66 ; C37.2 31.5,65.25 ; C37.2 31.5,66.75 ; C37.2 30.45,66 ; 31.85,25.8 C8.2 ; C8.2 33.35,25.8 ; C8.2 32.6,26.85 ; C8.2 32.6,24.75 ; U5.6 44.4,27.15 ; U5.6 45.5,26.55 ; U5.6 43.3,26.55 ; U5.6 44.4,25.95 ; R44.2 41.45,56.8 ; R44.2 39.95,56.8 ; R44.2 40.7,57.85 ; R44.2 40.7,55.75 ; 21.75,83.9 C22.2 ; C22.2 22.5,84.95 ; C22.2 22.5,82.85 ; C22.2 23.25,83.9 ; 36.9,24.15 R20.1 ; R20.1 37.95,24.9 ; R20.1 36.9,25.65 ; R20.1 35.85,24.9 ; 31.85,23.1 C7.2 ; C7.2 33.35,23.1 ; C7.2 32.6,22.05 ; C7.2 32.6,24.15 ; C2.2 43.25,36 ; C2.2 42.5,34.95 ; C2.2 42.5,37.05 ; C2.2 41.75,36 ; C4.2 20.1,32.15 ; C4.2 19.35,31.1 ; C4.2 20.85,31.1 ; C4.2 20.1,30.05 ; 23.15,26.7 C13.1 ; C13.1 24.2,27.45 ; C13.1 25.25,26.7 ; 43.3,21.47 U5.2 ; U5.2 44.4,22.07 ; U5.2 45.5,21.47 ; U5.2 44.4,20.87
  BOTTOM w0.3: C35.2 36.85,56.9 ; C35.2 36.1,57.95 ; C35.2 35.35,56.9 ; U3.3 19.03,80 ; U3.3 17.13,80 ; U3.3 18.08,79.05 ; U3.3 18.08,80.95 ; J1.8 16.24,37.82 ; J1.8 16.24,39.42 ; J1.8 15.44,38.62 ; J1.8 17.04,38.62 ; J7.4 61.74,72.32 ; J7.4 60.64,73.42 ; J7.4 61.74,74.52 ; C43.1 C44.1 ; C43.1 55.45,61.3 ; C43.1 C42.1 ; C44.1 54.7,58.05 ; C44.1 55.45,59.1 ; J2.8 17.14,19.12 ; J2.8 16.34,19.92 ; J2.8 15.54,19.12 ; J2.8 16.34,18.32 ; C42.1 55.45,63.5 ; C42.1 C41.1 ; C41.1 55.45,65.7 ; C41.1 54.7,66.75
  vias: v1(1.8,65.4) v1(2.7,43.5) v1(2.7,23.5) v1(3.2,76.7) v1(4.1,83) v1(6.1,9) v1(7.6,25.4) v1(9.2,80.1) v1(10,87.5) v1(11.5,4.1) v1(12.7,52.9) v1(12.8,66.2) v1(16,31.3) v1(17,9.5) v1(17.5,83) v1(17.7,55.8) v1(22.7,77.9) v1(22.7,64.5) v1(23.2,71.5) v1(24,3.9) v1(24.2,52) v1(24.9,83) v1(26,19.2) v1(26.1,74.8) v1(26.4,28.9) v1(26.6,42) v1(29.4,26.6) v1(29.5,56.4) v1(29.9,88.3) v1(29.9,48) v1(30.9,9.6) v1(31.3,35.8) v1(31.7,31.8) v1(33.3,50.9) v1(35,70) v1(35.2,16.9) v1(35.3,59.4) v1(36.5,33.5) v1(37.5,3.7) v1(39.1,40.4) v1(39.3,33.4) v1(41.1,54.8) v1(42.8,41.5) v1(44.1,11.7) v1(44.2,70) v1(44.3,59.4) v1(45.9,88.3) v1(45.9,31.8) v1(47.5,20.3) v1(47.6,72.6) v1(49,37.6) v1(49.7,65.7) v1(50,76.7) v1(51.1,80.5) v1(51.7,2.4) v1(53,37.4) v1(53,12.4) v1(53.9,71.1) v1(54.5,47.4) v1(55.4,54.1) v1(56.5,66.1) v1(56.6,75.8) v1(56.7,80.2) v1(56.8,68.7) v1(57.3,7.8) v1(58.2,40.1) v1(59.3,88.2) v1(60.4,71) v1(63.3,53.9) v1(65.3,73.3) v1(67.9,57.2) v1(68.2,70.3) v1(69.7,51.1) v1(72,88.1) v1(73.2,77.4) v1(74.8,63.8) v1(76.2,52.8) v3(3.5,88.5) v3(3.5,3.5) v3(83.5,88.5)
GND_EXT: length 238.6
  TOP w0.8: 82.65,56.6 82.65,64.3 ; 82.65,56.6 82.63,56.62 J5.3 ; 82.65,56.6 82.65,51.65 J5.1 ; 82.65,64.3 82.65,71.9 ; 82.65,64.3 82.59,64.24 J5.5 ; J6.2 30.24,81.84 31.2,82.8 61,82.8 62,81.8 C27.2 79.3,81.8 82.65,78.45 82.65,71.9 ; J5.7 82.61,71.86 82.65,71.9
  TOP w1: J3.2 4,64.1 6.2,61.9 D2.1 6.2,61.7 8.5,59.4 18.7,59.4 19.6,60.3 C19.2 ; U3.1 13,79.8 13.6,79.2 C20.2
  BOTTOM w0.5: U5.11 48.95,26.55 48.9,26.6 ; D8.3 78.54,71.85 78.55,71.86 J5.7 ; D7.3 78.52,56.65 78.55,56.62 J5.3 ; 48.9,24 48.9,22.1 49.53,21.47 U5.15 ; 48.9,24 48.9,26.6 ; 48.9,24 48.91,24.01 U5.13 ; 48.9,26.6 48.9,28.5 49.49,29.09 U5.9 50.9,40.2 59.7,49 J5.1
  BOTTOM w0.8: J6.2 30.24,81.76 24.9,87.1 15.8,87.1 13,84.3 U3.1
  BOTTOM w1: J3.2 6.09,69.19 9.4,72.5 9.4,76.4 U3.1
VDDA: length 6.8
  TOP w0.25: v1(27.7,58.1) 29.7,60.1 MCU1.22
  TOP w0.3: v1(27.7,58.1) C40.2
  BOTTOM w0.3: C40.2 v1(27.7,58.1)
VDDA_1.8: length 27.8
  TOP w0.25: 24.4,31.4 26,33 U1.7
  TOP w0.3: 24.4,31.4 24.1,31.1 v2(23.4,31.1) C4.1
  TOP w0.5: L1.2 v2(30.2,45.2)
  BOTTOM w0.5: v2(30.2,45.2) 30.2,37.9 v2(23.4,31.1) C4.1
VDDA_3.3: length 11.6
  TOP w0.25: 25.5,34 U1.5
  TOP w0.3: v2(23.3,35.9) 23.6,35.9 25.5,34
  TOP w0.5: C6.1 v2(23.3,35.9)
  BOTTOM w0.5: v2(23.3,35.9) C6.1 L2.2
DI_IN_0: length 19.8
  BOTTOM w0.2: R24.2 63.3,59.5 67.1,55.7 D7.2
  BOTTOM w0.3: J5.2 77.11,55.7 D7.2
DI_IN_1: length 20
  BOTTOM w0.2: D7.1 72.1,57.6 68.7,61 64.3,61 63.3,62 R26.2
  BOTTOM w0.3: J5.4 77.17,57.6 D7.1
DI_IN_2: length 20.5
  BOTTOM w0.2: D8.2 71.5,70.9 66.7,66.1 64.2,66.1 63.3,65.2 R32.2
  BOTTOM w0.3: J5.6 77.15,70.9 D8.2
DI_IN_3: length 20.3
  BOTTOM w0.2: R38.2 63.3,67.7 68.4,72.8 D8.1
  BOTTOM w0.3: D8.1 77.13,72.8 J5.8
DI_TTL_0: length 14.6
  TOP w0.2: 52.8,59.4 C44.2 v1(53.6,59.1) ; 52.8,59.4 53.6,60.2 56.5,60.2 56.93,59.77 U2.15 ; 52.8,59.4 51.6,60.6 MCU1.55
  BOTTOM w0.2: v1(53.6,59.1) C44.2
DI_TTL_1: length 14.1
  TOP w0.2: U2.13 58.09,62.31 58,62.4 53.6,62.4 52.8,61.6 C43.2 ; v1(53.6,61.3) C43.2 ; C43.2 52.6,61.1 MCU1.56
  BOTTOM w0.2: C43.2 v1(53.6,61.3)
DI_TTL_2: length 15
  TOP w0.2: MCU1.57 51.2,61.6 52.8,63.2 C42.2 ; U2.11 56.75,64.85 56.5,64.6 53.6,64.6 52.8,63.8 C42.2 ; C42.2 v1(53.6,63.5)
  BOTTOM w0.2: v1(53.6,63.5) C42.2
DI_TTL_3: length 15.9
  TOP w0.2: C41.2 52.8,65.4 49.5,62.1 MCU1.58 ; C41.2 v1(53.6,65.7) ; C41.2 52.8,66 54.2,67.4 57.49,67.4 57.5,67.39 U2.9
  BOTTOM w0.2: C41.2 v1(53.6,65.7)
DO_TTL_0: length 17
  TOP w0.2: MCU1.26 33.25,54.75 v1(36.3,51.7)
  BOTTOM w0.2: R27.1 41.1,46.9 v1(36.3,51.7)
DO_TTL_1: length 18.7
  TOP w0.2: v1(36.3,52.6) 34.75,54.15 MCU1.29
  BOTTOM w0.2: R28.1 47.1,48 46.1,49 39.9,49 v1(36.3,52.6)
DO_TTL_2: length 20.2
  TOP w0.2: MCU1.30 35.25,54.55 v1(36.3,53.5)
  BOTTOM w0.2: R33.1 49.3,48.1 47.9,49.5 40.3,49.5 v1(36.3,53.5)
DO_TTL_3: length 21.7
  TOP w0.2: MCU1.31 35.75,54.95 v1(36.3,54.4)
  BOTTOM w0.2: R34.1 51.5,48.1 49.6,50 40.7,50 v1(36.3,54.4)
ETH1_LED0: length 38.8
  TOP w0.2: v1(5.7,56.9) R17.2 12.5,55.4 18.7,49.2 23.5,49.2 32.75,39.95 U1.44
  BOTTOM w0.2: R17.2 v1(5.7,56.9)
ETH1_LED1: length 34.5
  TOP w0.2: R16.2 12.1,56.4 18.9,49.6 23.7,49.6 33.25,40.05 U1.43
ETH2_LED0: length 12.4
  TOP w0.2: R22.2 26.2,45.2 31.75,39.65 U1.46
ETH2_LED1: length 13.9
  TOP w0.2: U1.45 32.25,39.8 24.85,47.2 R21.2
ETH_CRS_DV: length 35.2
  TOP w0.2: U1.25 37.8,30.07 39.38,28.5 41.2,28.5 41.6,28.9 41.6,50.2 36.25,55.55 MCU1.32
ETH_MDC: length 31.4
  TOP w0.2: MCU1.16 32.9,63.1 33.4,62.6 33.4,58.6 32.4,57.6 32.4,54.6 37.8,49.2 U1.36
ETH_MDIO: length 25.6
  TOP w0.2: v1(30.2,58.6) MCU1.25 31.5,55.17 31.5,55.16 31.5,54.84 31.5,54.83 31.5,54.1 36.25,49.35 U1.37
  BOTTOM w0.2: v1(30.2,58.6) MCU1.25
ETH_REF_CLK: length 42.2
  TOP w0.2: MCU1.24 32.3,59.1 32.5,58.9 32.5,58.42 31.9,57.83 31.9,54.4 36.7,49.6 36.7,36.7 35.8,35.8 35.8,31.3 39,28.1 41.85,28.1 42.5,28.75 R15.1 R19.1
ETH_RXD0: length 26.9
  TOP w0.2: R9.2 43.25,34 44,34.75 44,48.5 36.75,55.75 MCU1.33
ETH_RXD1: length 28.7
  TOP w0.2: MCU1.34 37.25,55.95 44.5,48.7 44.5,34.3 42.5,32.3 R11.2
ETH_TX_EN: length 40.2
  TOP w0.2: U1.16 32.25,30.35 32.9,31 35.5,31 38.8,27.7 43.8,27.7 45,28.9 45,49.4 43.6,50.8 R45.2
ETH_TXD0: length 45.2
  TOP w0.2: U1.20 34.25,27.35 34.9,26.7 44.8,26.7 46.9,28.8 46.9,45.3 51.1,49.5 R42.2
ETH_TXD1: length 49.7
  TOP w0.2: R41.2 51.1,58.8 52,57.9 52,49.7 47.4,45.1 47.4,28.5 45.1,26.2 34.7,26.2 33.75,27.15 U1.19
FLASH_CS: length 11.5
  TOP w0.2: U4.1 53.1,76 51.7,74.6 46.1,74.6 44.75,73.25 MCU1.77
FLASH_MISO: length 18.6
  TOP w0.2: U4.2 53.65,77.27 51.72,79.2 43.9,79.2 43.1,78.4 43.1,74.7 43.75,74.05 MCU1.79
FLASH_MOSI: length 11.7
  TOP w0.2: U4.5 43.91,79.81 42.7,78.6 42.7,74.5 43.25,73.95 MCU1.80
FLASH_SCK: length 10.2
  TOP w0.2: MCU1.78 44.25,74.15 43.5,74.9 43.5,78.2 43.84,78.54 U4.6
RELAY_0: length 8.6
  TOP w0.2: J6.6 40.4,76.17 42.75,73.82 MCU1.81
RELAY_0_IN: length 15.6
  TOP w1.5: J4.1 80,8.5 76.8,5.3 K1.4
RELAY_0_OUT: length 22.7
  TOP w1.5: J4.2 78.05,20.11 76.8,18.86 76.8,13.65 68.45,5.3 K1.3
RELAY_1: length 9.5
  TOP w0.2: J6.5 37.86,78.14 42.25,73.75 MCU1.82
RELAY_1_IN: length 12.5
  BOTTOM w1.5: J4.3 78.05,23.92 73.5,19.37 K2.4
RELAY_1_OUT: length 20.3
  TOP w1.5: K2.3 68.45,15.3 76.8,23.65 76.8,26.48 78.05,27.73 J4.4
RELAY_2: length 10.3
  TOP w0.2: J6.4 41.75,73.57 MCU1.83
RELAY_2_IN: length 10.3
  BOTTOM w1.5: J4.5 77.74,31.54 73.5,27.3 K3.4
RELAY_2_OUT: length 17.7
  TOP w1.5: K3.3 68.7,25.3 78.75,35.35 J4.6
RELAY_3: length 12.2
  TOP w0.2: MCU1.84 41.25,73.28 36.53,78 34.8,78 33.58,79.22 33.56,79.22 J6.3
RELAY_3_IN: length 8.1
  BOTTOM w1.5: J4.7 77.36,39.16 K4.4
RELAY_3_OUT: length 16.7
  TOP w1.5: K4.3 74.17,42.97 J4.8
RST: length 59.2
  TOP w0.2: R40.2 64.9,78.5 J7.6 58.54,81.7 32.6,81.7 31.5,80.6 31.5,79.4 28.7,76.6 28.7,73.7 30.3,72.1 31.9,72.1 33.1,70.9 v1(33.1,64.1) MCU1.14
  BOTTOM w0.2: MCU1.14 v1(33.1,64.1)
RXM1: length 21.2
  TOP w0.2: U1.1 27.8,36 18.05,45.75 16.7,45.75 16.24,46.21 J1.2
  BOTTOM w0.2: J1.2 17.28,45.2 R3.2
RXM2: length 19.2
  TOP w0.2: U1.8 28.3,32.5 28.2,32.4 27.5,32.4 21.44,26.34 16.74,26.34 J2.2
  BOTTOM w0.2: R10.2 19.36,26.74 J2.2
RXP1: length 26.6
  TOP w0.2: U1.2 28.3,35.5 28.2,35.6 27.64,35.6 17.88,45.35 15.85,45.35 J1.1
  BOTTOM w0.2: R5.2 J1.1
RXP2: length 25
  TOP w0.2: J2.1 15.86,25.94 21.61,25.94 27.67,32 U1.9
  BOTTOM w0.2: R12.2 14.4,28.6 J2.1
SWCLK: length 15.7
  TOP w0.2: MCU1.76 45.25,72.8 46.55,74.1 57.34,74.1 J7.2
SWDIO: length 14.6
  TOP w0.2: MCU1.72 48.6,69.1 49.3,68.4 54.18,68.4 J7.3
SWO: length 24.2
  TOP w0.2: MCU1.89 38.75,74.35 v1(38.8,74.4)
  BOTTOM w0.2: v1(38.8,74.4) 42.9,78.5 J7.1
TXM1: length 19.3
  TOP w0.2: J1.6 16.7,40.7 20.8,40.7 26.5,35 U1.3
  BOTTOM w0.2: R6.2 19.05,40.6 19.04,40.59 16.81,40.59 J1.6
TXM2: length 22.3
  TOP w0.2: J2.6 19.38,24.7 24.57,24.7 30.1,30.23 30.1,30.8 29.9,31 U1.11
  BOTTOM w0.2: R13.2 19.76,21.66 J2.6
TXP1: length 28.3
  TOP w0.2: J1.3 15.2,43.46 15.2,40.9 15.8,40.3 20.6,40.3 26.3,34.6 28,34.6 28.1,34.5 U1.4
  BOTTOM w0.2: R7.2 18.2,42.9 16.14,44.96 J1.3
TXP2: length 24.9
  TOP w0.2: U1.12 29.2,29.9 24.4,25.1 14.16,25.1 J2.3
  BOTTOM w0.2: J2.3 18.64,25.46 19.8,24.3 R14.2
VREF: length 6.2
  TOP w0.25: C38.2 26.8,60.6 v1(27.7,60.6) MCU1.21
  BOTTOM w0.25: v1(27.7,60.6) 26.8,60.6 C38.2
N3788396: length 3.4
  TOP w0.2: MCU1.94 36.25,75.65 R39.2
N3788604: length 3
  TOP w0.2: MCU1.73 C36.2
N3788651: length 3.5
  TOP w0.2: MCU1.49 44.75,55.15 45.8,54.1 C39.2
N3796397: length 2.6
  TOP w0.2: MCU1.37 v1(38.75,55.55)
  BOTTOM w0.2: v1(38.75,55.55) 38.75,56.75 R44.1
N3796963: length 3
  TOP w0.2: R45.1 43.6,54.9 44.25,55.55 MCU1.48
N4537878: length 2.8
  TOP w0.3: U2.2 65.23,59.8 v1(66.6,59.8)
  BOTTOM w0.3: R24.1 v1(66.6,59.8)
N4538644: length 2.8
  TOP w0.3: U2.4 v1(66.6,62.31)
  BOTTOM w0.3: R26.1 65.21,62.31 v1(66.6,62.31)
N4538843: length 2.8
  TOP w0.3: U2.8 v1(66.59,67.39)
  BOTTOM w0.3: R38.1 65.21,67.39 v1(66.59,67.39)
N4539052: length 2.8
  TOP w0.3: U2.6 65.25,64.9 v1(66.6,64.9)
  BOTTOM w0.3: R32.1 v1(66.6,64.9)
N4547709: length 3.1
  TOP w0.2: MCU1.51 47.8,58.6 49.2,57.2 R42.1
N4547713: length 2.2
  TOP w0.2: R41.1 MCU1.52
N4548481: length 7.2
  TOP w0.25: R8.2 U1.6
N4551709: length 9.8
  TOP w0.2: U1.14 31.25,23.45 30.3,22.5 Y1.3 C16.1
N4551769: length 8
  TOP w0.2: C17.1 Y1.1 32.3,24.2 31.75,24.75 U1.15
N4553149: length 2.6
  TOP w0.2: U1.24 36.25,28.38 36.62,28 v1(36.9,28)
  BOTTOM w0.2: R20.2 v1(36.9,28)
N4554278: length 5.5
  TOP w0.2: U1.35 38.8,35.5 39.6,36.3 v1(39.6,38.7)
  BOTTOM w0.2: v1(39.6,38.7) R4.1
N4554434: length 3
  TOP w0.2: v1(35.55,39.05) 35.25,38.75 U1.39
  BOTTOM w0.2: R2.1 35.55,40.35 v1(35.55,39.05)
N4554520: length 4.8
  BOTTOM w0.2: C11.2 R5.1 R3.1
N4554841: length 5.2
  BOTTOM w0.2: R7.1 R6.1 23,40.6 23.9,41.5 C12.2
N4555040: length 4.8
  BOTTOM w0.2: R10.1 R12.1 C13.2
N4555226: length 4.8
  BOTTOM w0.2: C14.2 R13.1 R14.1
N4558201: length 5.1
  TOP w0.2: U1.47 31.25,38.45 30.1,39.6 v1(29.3,39.6) C10.2
  BOTTOM w0.2: C10.2 v1(29.3,39.6)
N4585606: length 3.5
  TOP w0.2: U1.26 39.7,31 40.6,30.1 R15.2
N4585853: length 3.6
  TOP w0.2: R9.1 40.6,33.7 39.4,32.5 U1.29
N4585857: length 2.8
  TOP w0.2: U1.28 R11.1
N4589372: length 8.8
  TOP w0.2: R17.1 3.8,48.49 J1.10
N4589863: length 18
  TOP w0.2: R16.1 7.7,54.5 4.3,51.1 4.3,40.83 J1.11
N4590672: length 42.6
  TOP w0.2: R21.1 21.8,47.5 20.9,48.4 13.27,48.4 4.5,39.63 4.5,21.43 J2.11
N4590712: length 38.8
  TOP w0.2: J2.10 3.7,28.8 3.7,39.5 13,48.8 22,48.8 22.8,48 22.8,46.5 21.8,45.5 R22.1
N4616330: length 13.3
  TOP w0.2: R19.2 46,28.7 44.6,27.3 36.2,27.3 35.75,27.75 U1.23
N4623177: length 5.9
  TOP w1: J3.1 D1.2
N4623416: length 13.1
  TOP w1: D1.1 D2.2 F1.2
N4630323: length 8.8
  TOP w1: U3.2 15.54,78.65 15.5,78.61 C20.1 L3.2
N4647911: length 16.6
  BOTTOM w0.3: U5.16 50.9,9.4 K1.2
N4648415: length 9.9
  BOTTOM w0.2: 54.95,15.25 K2.2
  BOTTOM w0.3: U5.14 52,22.74 52.9,21.84 52.9,17.4 K2.2
N4648882: length 10
  BOTTOM w0.2: 54.95,35.35 K4.2
  BOTTOM w0.3: K4.2 55,33.82 52.9,31.72 52.9,28.6 52.12,27.82 U5.10
N4649360: length 4.1
  BOTTOM w0.3: K3.2 54.98,25.28 U5.12
N4658948: length 28
  BOTTOM w0.2: R27.2 44.9,34.5 41.2,30.8 41.2,22.9 43.9,20.2 U5.1
N4659355: length 26.1
  BOTTOM w0.2: U5.3 43.9,22.74 41.7,24.94 41.7,30.6 45.4,34.3 45.4,43.6 46.8,45 R28.2
N4659946: length 24
  BOTTOM w0.2: R33.2 49,45 45.9,41.9 45.9,34.1 42.2,30.4 42.2,26.98 43.9,25.28 U5.5
N4659970: length 22
  BOTTOM w0.2: U5.7 43.9,27.82 42.7,29.02 42.7,30.2 46.4,33.9 46.4,40.2 51.2,45 R34.2

## Copper pours and planes (outline as drawn; the poured copper is in the pictures)
GND on TOP: 0.5,0.5 0.5,91.5 86.5,91.5 86.5,46.3 64.9,46.3 59.5,40.9 59.5,0.5 ; 15 cut-outs
GND on BOTTOM: 0.5,0.5 0.5,91.5 86.5,91.5 86.5,46.3 64.9,46.3 59.5,40.9 59.5,0.5 ; 4 cut-outs

## Text on the board
Ref Des/Silkscreen Bottom: SWCLK | SWO | SWDIO | GND | RST | VCC | DI4 | DI2 | DI1 | DI3 | 24V | DO3 | DO2 | DO1 | DO0 | RELAY3 | RELAY2 | RELAY1 | RELAY0
Ref Des/Silkscreen Top: SH-Z-004 | 20181118 | v1.1 | SWCLK | SWDIO | SWO | VCC | GND | RST | DI3 | DI2 | DI4 | DI1 | 24V | DO1 | DO2 | DO3 | DO4 | RELAY3 | RELAY2 | RELAY1 | RELAY0
NCLEGEND-1-2: FIGURE | FINISHED_SIZE | 0.3 | 0.5 | 0.8 | 1.0 | 1.2 | 1.6 | 3.0 | 3.2 | DRILL CHART: TOP to BOTTOM | ALL UNITS ARE IN MILLIMETERS | PLATED | NON-PLATED | QTY | 112 | 4 | 28 | 12 | 30 | 2 | 1 | 202 | TOTAL HOLES:
